# Altium PCB PSPCB.PcbDoc
Units mm, origin at the board's own origin, x right, y up, seen from the top; angles counter-clockwise.
Board outline 50 x 50 mm, 2 copper layers (Top Layer, Bottom Layer); 14 components, 11 nets, 44 pads, 0 vias.
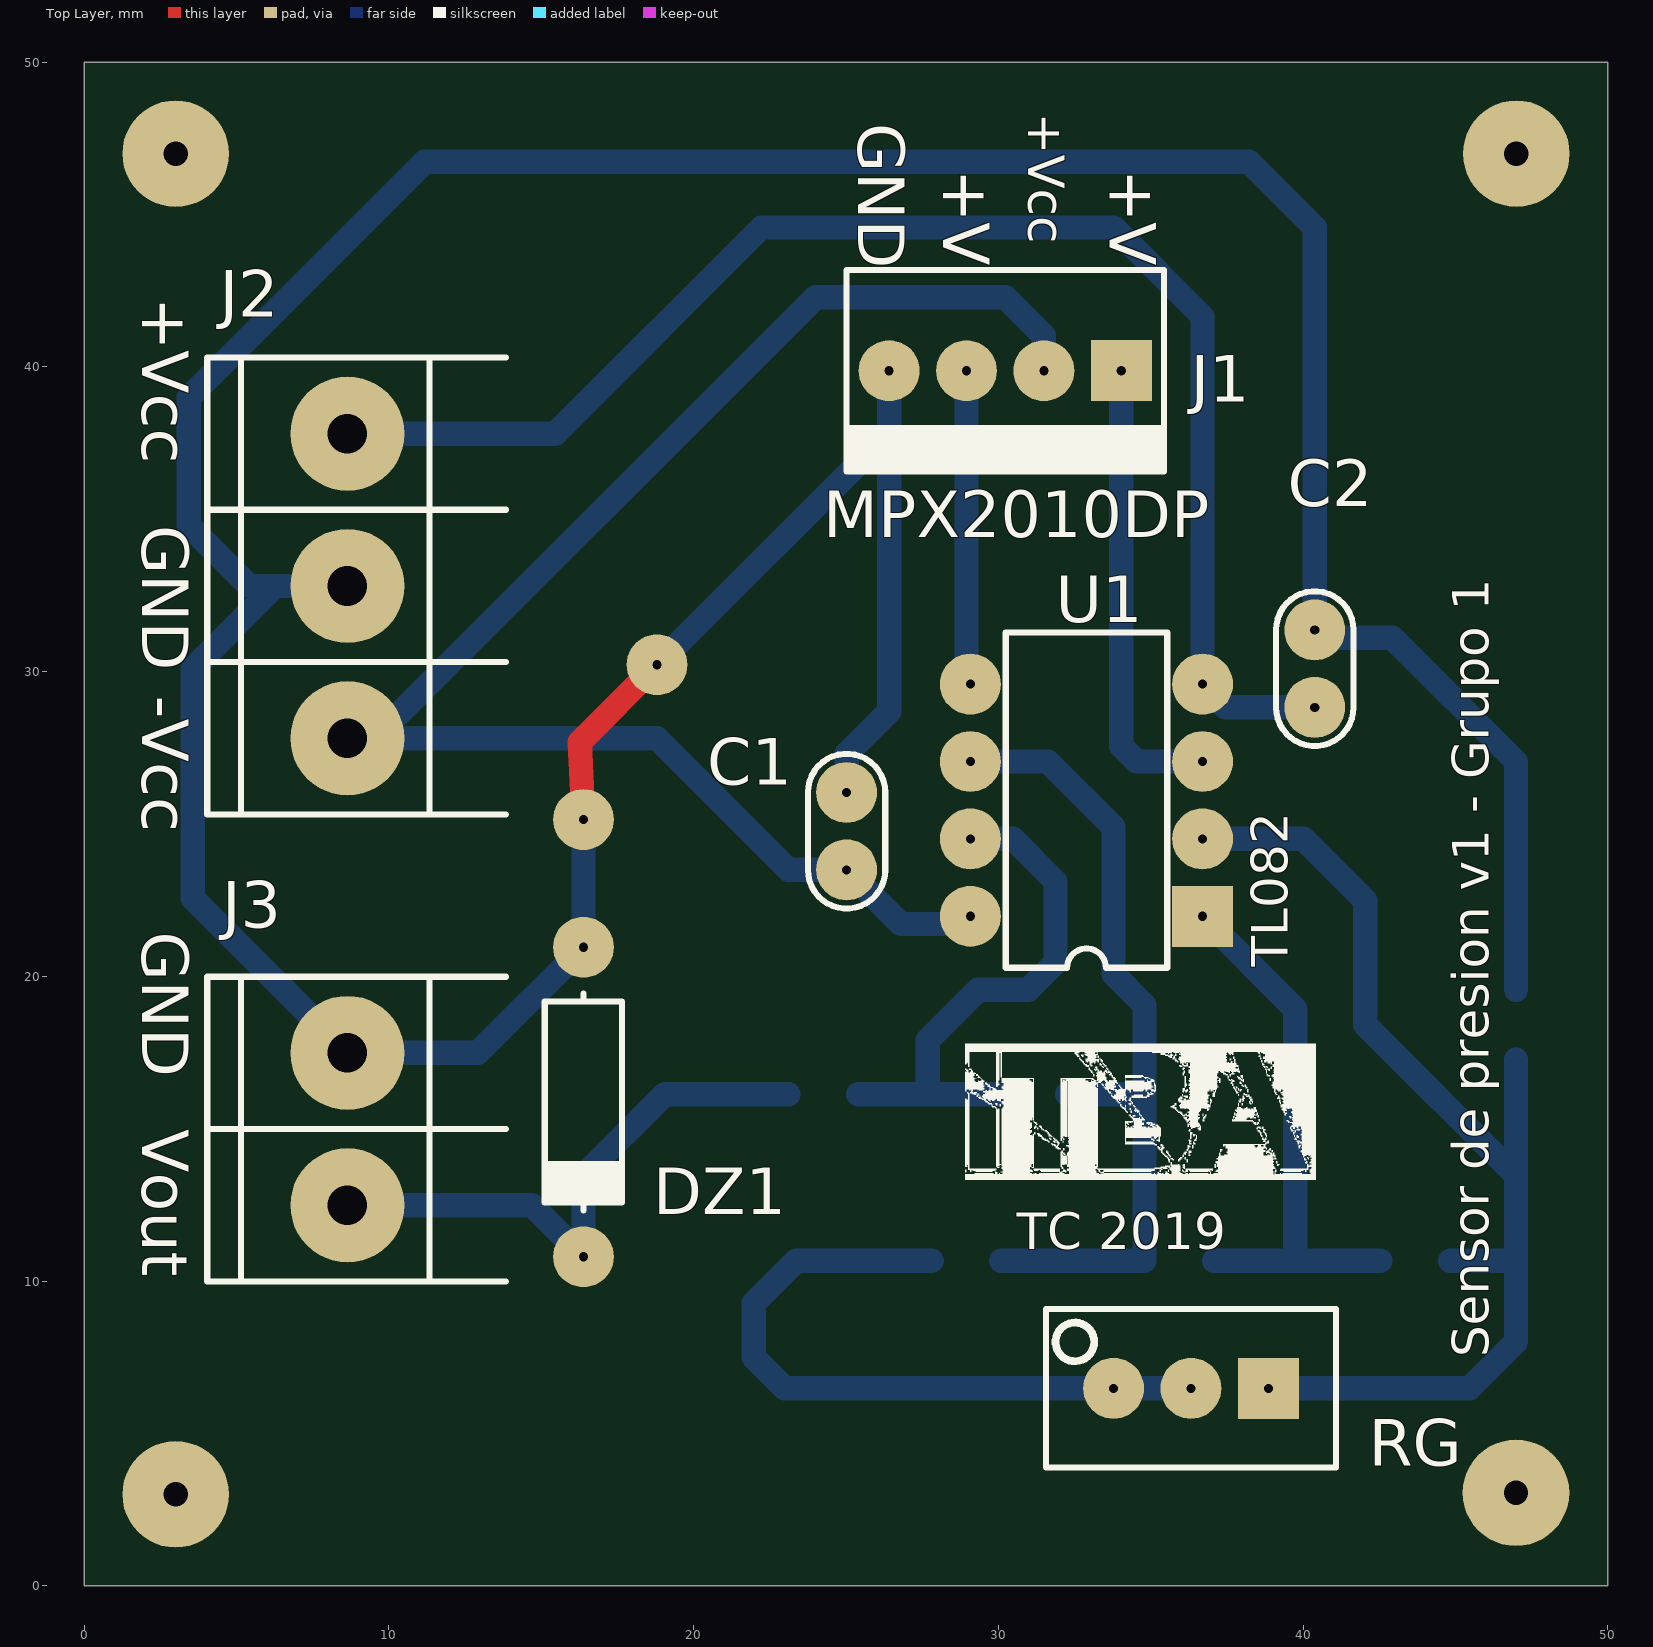
[diagram p0: Top Layer view]
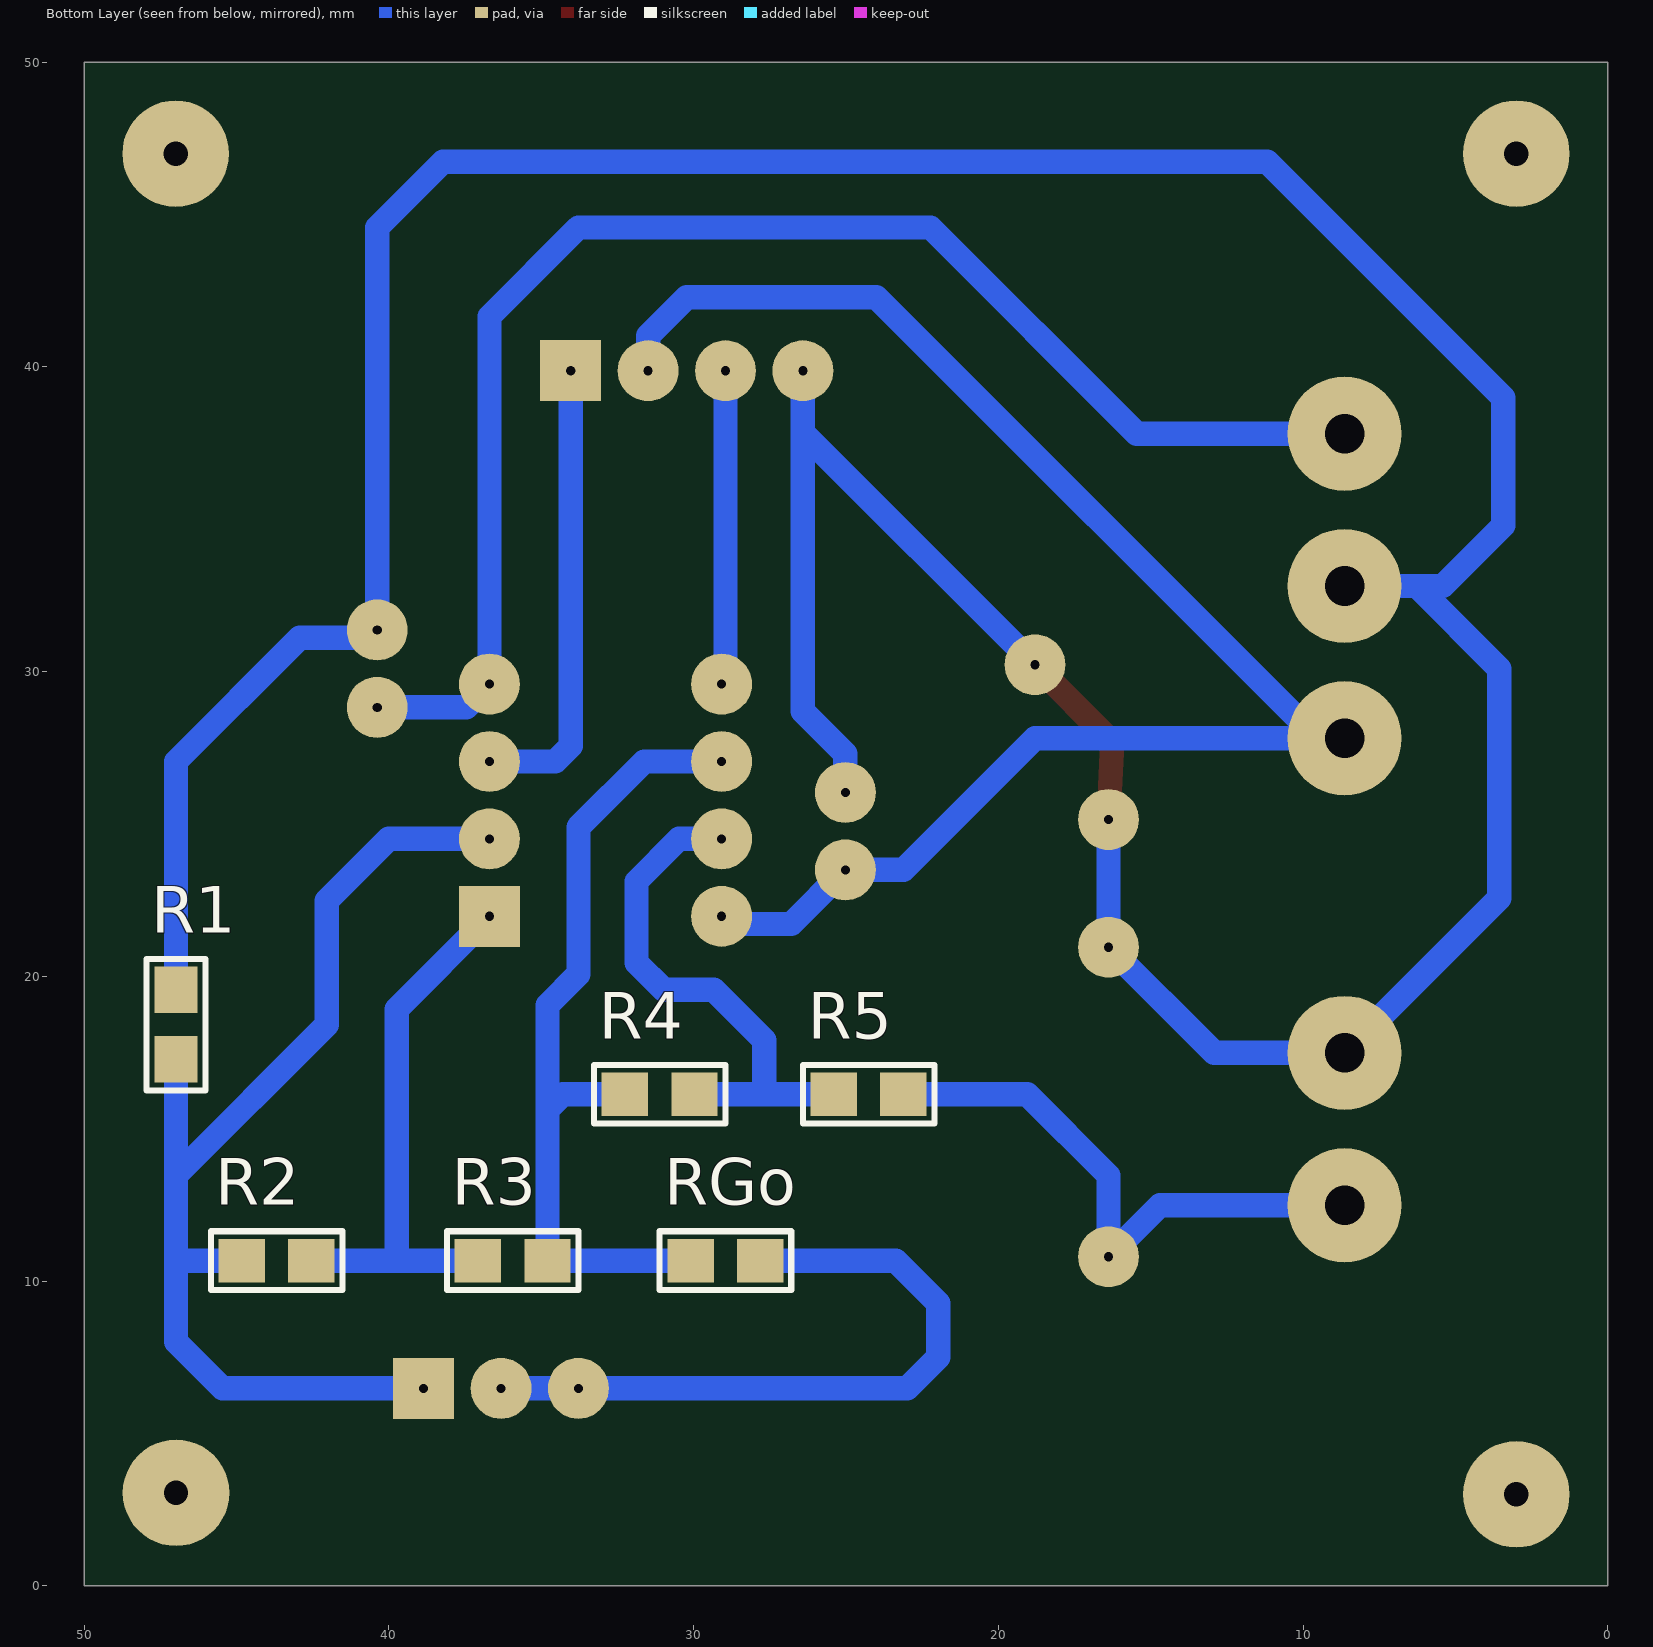
[diagram p1: Bottom Layer view, seen from below]

## Layer stack, top to bottom
Top Solder: solder mask 0.0102, Solder Resist, Dk 3.5
Top Layer: signal copper 0.0356
Dielectric 1: dielectric 0.32, FR-4, Dk 4.8
Bottom Layer: signal copper 0.0356
Bottom Solder: solder mask 0.0102, Solder Resist, Dk 3.5

## Board outline
0,0 50,0 50,50 0,50

## Design rules (kind name [scope] priority, off if disabled: settings)
Clearance [All] p1: gap=0.254 ignorepadtopadclearanceinfootprint=FALSE except(0: Arc-Hole Track-Hole SMDPad-Hole THPad-Hole Via-Hole Fill-Hole Poly-Hole Region-Hole Text-Hole; 0.4: Arc-Arc Arc-Track Arc-SMDPad Track-Track Track-SMDPad SMDPad-SMDPad)
PolygonConnect [All] p1: connectstyle=Relief reliefconductorwidth=0.254 reliefentries=4 polygonreliefangle="90 Angle" airgapwidth=0.254
RoutingVias [All] p1: holewidth=0.711 width=1.27 viastyle="Through Hole" minholewidth=0.711 minwidth=1.27 maxholewidth=0.711 maxwidth=1.27
SolderMaskExpansion [All] p1: expansion=0.102
Width [All] p1: maxlimit=0.9 minlimit=0.6 preferedwidth=0.8
30 further rules are at their usual default settings.

## Components (designator, comment, footprint, x,y, rotation, side; value= is the part's Value field where it differs from the comment)
C1 "CAP" CAP100 25.019,24.765 r90 top
C2 "CAP" CAP100 40.386,30.099 r90 top
DZ1 "DIODO ZENER" DO41 16.383,15.875 r270 top
J1 "Sensor" MOLEX4 34.036,39.878 r180 top
J2 "Supply" BORNERA3 8.636,32.813 r0 top
J3 "Out" BORNERA2 8.636,14.986 r0 top
R1 "RESmd" 0805 46.99,18.415 r270 bottom
R2 "RESmd" 0805 43.688,10.668 r180 bottom
R3 "RESmd" 0805 35.941,10.668 r180 bottom
R4 "RESmd" 0805 31.115,16.129 r180 bottom
R5 "RESmd" 0805 24.257,16.129 r180 bottom
RG "PRESET" "PRESET V" 36.322,6.477 r180 top
RGo "RESmd" 0805 28.956,10.668 r0 bottom
U1 "TL082P" P008 32.893,25.781 r90 top

## Footprints (in the part's own frame and the unit in brackets; to place one, negate y for a bottom-side part, rotate by r counter-clockwise, add the part's x,y. Pads: shape width x height; smd on the part's side, far side on the other; paste and mask are expansions set on the pad)
0805 [mil] "Pasivo 0805"
  rect 60x56 smd: 1(-45,0) 2(45,0)
  silkscreen extent -85,-38 85,38, body extent -39,-25 39,25, height 15
BORNERA2 [mm] "Bornera con Tornillos 5mm separación"
  round 3.75 hole 1.3: 1(0,2.5) 2(0,-2.5)
  silkscreen extent -4.6,-5 5.2,5, body extent -3.76,-4.89 3.94,5.61, height 10
BORNERA3 [mm] "Bornera con Tornillos 5mm separación"
  round 3.75 hole 1.3: 1(0,5) 2(0,0) 3(0,-5)
  silkscreen extent -4.6,-7.5 5.2,7.5, body extent -3.76,-7.39 3.94,8.11, height 10.05
CAP100 [mm]
  round 2 hole 0.3: 1(-1.27,0) 2(1.27,0)
  silkscreen extent -2.54,-1.27 2.54,1.27, body extent -2.92,-0.84 2.92,0.86, height 6.12
DO41 [mm]
  round 2 hole 0.3: 1(-5.08,0) 2(5.08,0)
  silkscreen extent -3.56,-1.27 3.56,1.27, body extent -5.46,-1.19 5.46,1.37, height 2.03
MOLEX4 [mm]
  rect 2x2 hole 0.3: 1(0,0)
  round 2 hole 0.3: 2(2.54,0) 3(5.08,0) 4(7.62,0)
  silkscreen extent -1.4,-3.3 9.02,3.3, body extent -1.27,-3.17 8.89,3.18, height 10.74
P008 [mm] "DIP; 8 Leads; Row Spacing 7.62 mm; Pitch 2.54 mm"
  rect 2x2 hole 0.3: 1(-3.81,-3.81)
  round 2 hole 0.3: 2(-1.27,-3.81) 3(1.27,-3.81) 4(3.81,-3.81) 5(3.81,3.81) 6(1.27,3.81) 7(-1.27,3.81) 8(-3.81,3.81)
  silkscreen extent -5.5,-2.65 5.5,2.65
"PRESET V" [mm]
  rect 2x2 hole 0.3: 1(-2.54,0)
  round 2 hole 0.3: 2(0,0) 3(2.54,0)
  silkscreen extent -4.76,-2.6 4.76,2.6, body extent -4.7,-2.42 4.83,2.42, height 11.55

## Part data
J1: library part MOLEX4
J2: library part "BORNERA 3"
J3: library part "BORNERA 2"
R1 R2 R3 R4 R5 RGo: library part RES
U1: "JFET-Input Operational Amplifier", Code_JEDEC=MO-001-AN, ComponentLink1Description="Manufacturer Link", ComponentLink1URL=http://www.ti.com/, ComponentLink2Description=Datasheet, ComponentLink2URL=http://www-s.ti.com/sc/ds/tl082.pdf, DatasheetVersion=Feb-1999, LatestRevisionDate=04-Mar-2005, LatestRevisionNote="Stylized 3D Model Added.", PackageDescription="DIP; 8 Leads; Row Spacing 7.62 mm; Pitch 2.54 mm", PackageReference=P008, PackageVersion=Jun-1999, Published=16-Jan-2001, Publisher="Altium Limited"

## Free pads (board coordinates)
  round 2 hole 0.3: 4(18.796,30.226) 5(16.383,25.146)
  round 3.5 hole 0.8: 6(3,3) 6(3,47) 6(46.99,3.048) 6(47,47)

## Nets (pads, with @x,y where several pads share a name; then routed paths per layer and width w, separated by ;. In a path a pad name is that pad's centre, name@x,y a point inside that pad or via, vN(x,y) a via of type N, cw(c..) or ccw(c..) an arc to the next point about the centre after c; other vN are vias at no path point)
+v: J1.3 U1.5 | length 10.3
  Bottom Layer w0.8: J1.3 28.956,29.718 U1.5
+vcc: C1.1 J1.2 J2.3 U1.8 | length 53.1
  Bottom Layer w0.8: J2.3 J2.3@9.525,27.813 ; U1.8@28.829,22.225 U1.8 28.829,21.717 26.797,21.717 C1.1 23.114,23.495 18.796,27.813 J2.3@9.525,27.813 ; J1.2 31.496,41.021 30.226,42.291 24.003,42.291 J2.3@9.525,27.813
-v: J1.1 U1.3 | length 15.7
  Bottom Layer w0.8: J1.1@33.655,39.497 J1.1 34.036,27.559 34.544,27.051 U1.3
-vcc: C2.1 J2.1 U1.4 | length 49.6
  Bottom Layer w0.8: J2.1@9.652,38.829 J2.1 15.461,37.813 22.225,44.577 33.782,44.577 36.703,41.656 U1.4 37.465,28.829 C2.1
GND: C1.2 C2.2 DZ1.1 J1.4 J2.2 J3.1 pad.4 pad.5 R1.1 | length 143
  Top Layer w0.8: pad.5 16.256,27.686 pad.4
  Bottom Layer w0.8: J2.2 6.27,32.813 ; pad.5@16.383,24.511 DZ1.1 12.914,17.486 J3.1 3.556,22.566 3.556,30.099 6.27,32.813 ; pad.4 26.416,37.846 ; C1.2 25.019,27.305 26.416,28.702 26.416,37.846 ; J1.4 26.416,37.846 ; R1.1 46.99,27.051 42.926,31.115 40.64,31.115 C2.2 40.386,44.577 38.227,46.736 11.176,46.736 3.429,38.989 3.429,34.798 5.414,32.813 6.27,32.813
NetR1_2: R1.2 R2.1 RG.1 U1.2 | length 37.5
  Bottom Layer w0.8: U1.2 40.005,24.511 42.037,22.479 42.037,18.415 46.99,13.462 ; RG.1 45.466,6.477 46.99,8.001 46.99,10.795 ; R2.1 46.863,10.668 46.99,10.795 ; R1.2 46.99,13.462 ; 46.99,10.795 46.99,13.462
NetR2_2: R2.2 R3.1 U1.1 | length 18
  Bottom Layer w0.8: U1.1 39.751,18.923 39.751,10.668 ; R3.1 39.751,10.668 ; R2.2 39.751,10.668
NetR3_2: R3.2 R4.1 RGo.2 U1.6 | length 27.7
  Bottom Layer w0.8: U1.6 31.623,27.051 33.782,24.892 33.782,20.066 34.798,19.05 34.798,15.621 ; RGo.2 R3.2 34.798,15.621 ; R4.1 34.29,16.129 34.798,15.621
NetR4_2: R4.2 R5.1 U1.7 | length 17.6
  Bottom Layer w0.8: R5.1 27.686,16.129 ; U1.7 30.48,24.511 31.877,23.114 31.877,20.447 30.988,19.558 29.337,19.558 27.686,17.907 27.686,16.129 ; R4.2 27.686,16.129
NetRG_2: RG.2 RG.3 RGo.1 | length 23
  Bottom Layer w0.8: RGo.1 23.368,10.668 21.971,9.271 21.971,7.493 22.987,6.477 RG.3 RG.2
vout: DZ1.2 J3.2 R5.2 | length 19
  Bottom Layer w0.8: J3.2 14.692,12.486 DZ1.2 16.383,13.462 19.05,16.129 R5.2

## Silkscreen, mask and mechanical layers (free items; w line width, h text height)
Top Overlay:
  drawing of 174 lines, arcs and shapes, not listed
  text "+Vcc" at 30.988,48.342 h1.2 r270
  text "GND" at 25.4,48.006 h1.52 r270
  text "+V" at 28.194,46.482 h1.52 r270
  text "+V" at 33.655,46.482 h1.52 r270
  text "+Vcc" at 1.905,42.291 h1.52 r270
  text "GND" at 1.905,34.798 h1.52 r270
  text "MPX2010DP" at 24.257,34.417 h1.52
  text "-Vcc" at 1.905,29.21 h1.52 r270
  text "GND" at 1.905,21.463 h1.52 r270
  text "TL082" at 39.497,20.32 h1.2 r90
  text "Vout" at 1.905,14.986 h1.52 r270
  text "TC 2019" at 30.607,11.049 h1.2
  text "Sensor de presion v1 - Grupo 1" at 46.101,7.493 h1.2 r90
Mechanical 1:
  the board outline again, w0.1